# Altium PCB No.2 运放板.PcbDoc
Units mm, origin at the board's own origin, x right, y up, seen from the top; angles counter-clockwise.
Board outline 50 x 60 mm, 2 copper layers (Top Layer, Bottom Layer), stack 0.325 mm thick; 27 components, 23 nets, 87 pads, 10 vias.
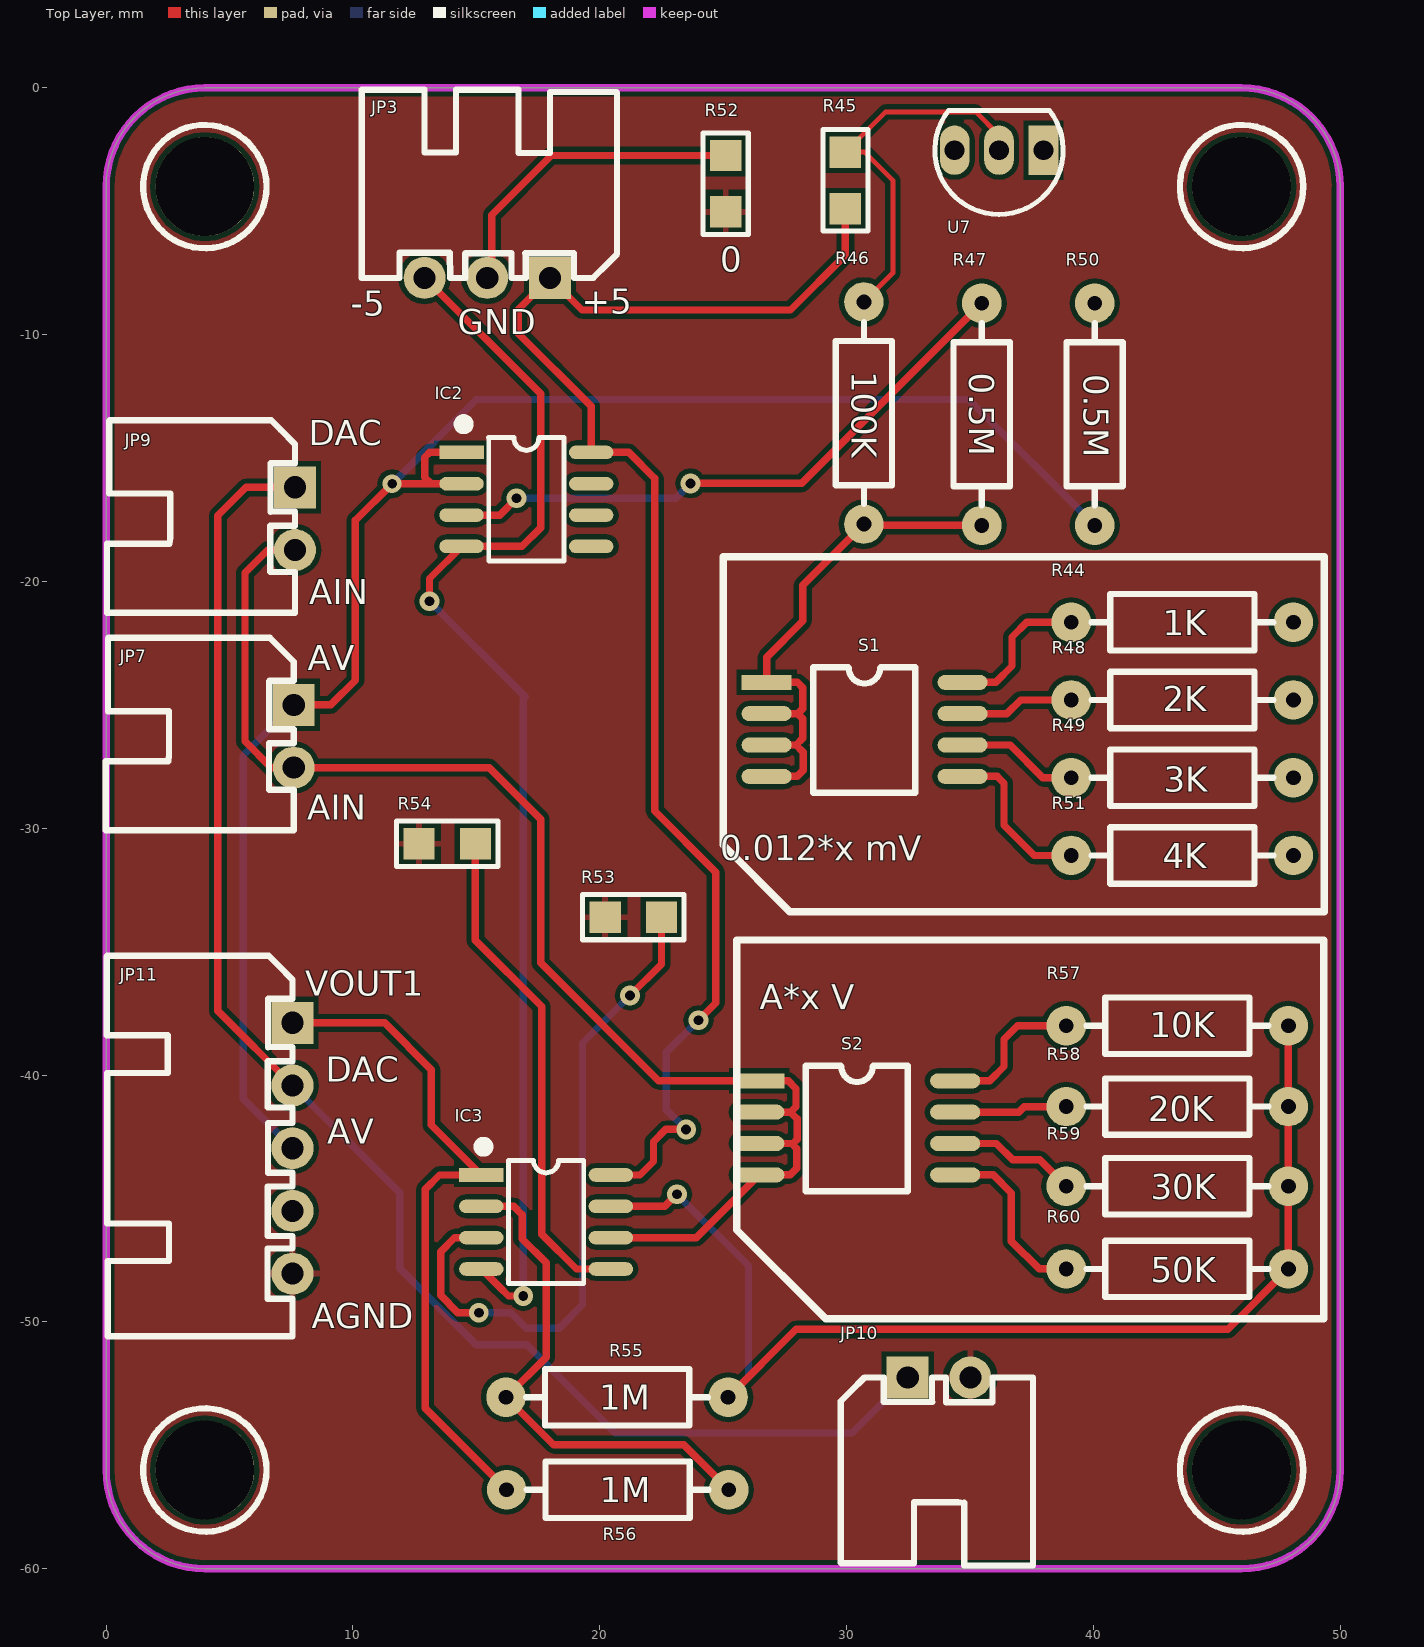
[diagram p0: Top Layer view]
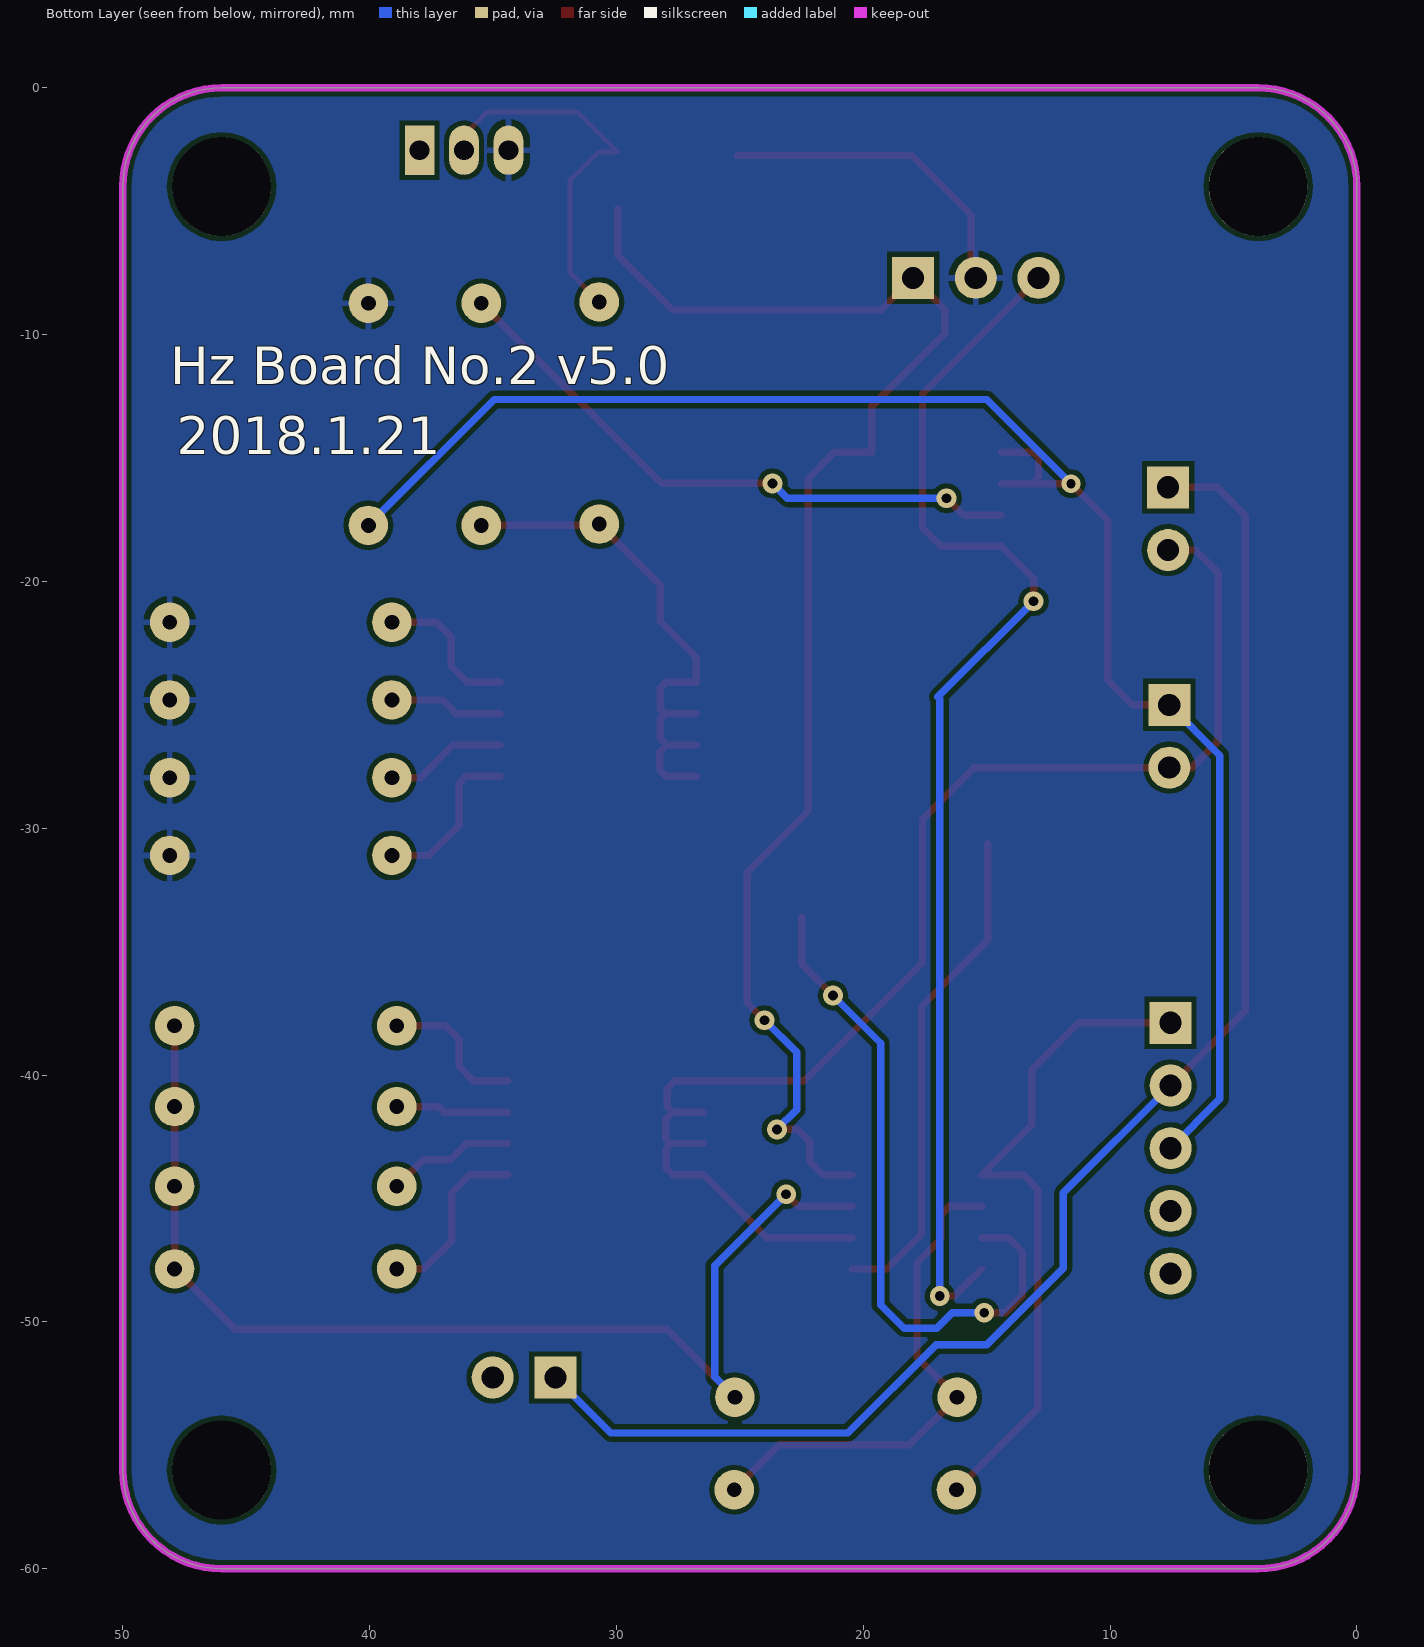
[diagram p1: Bottom Layer view, seen from below]
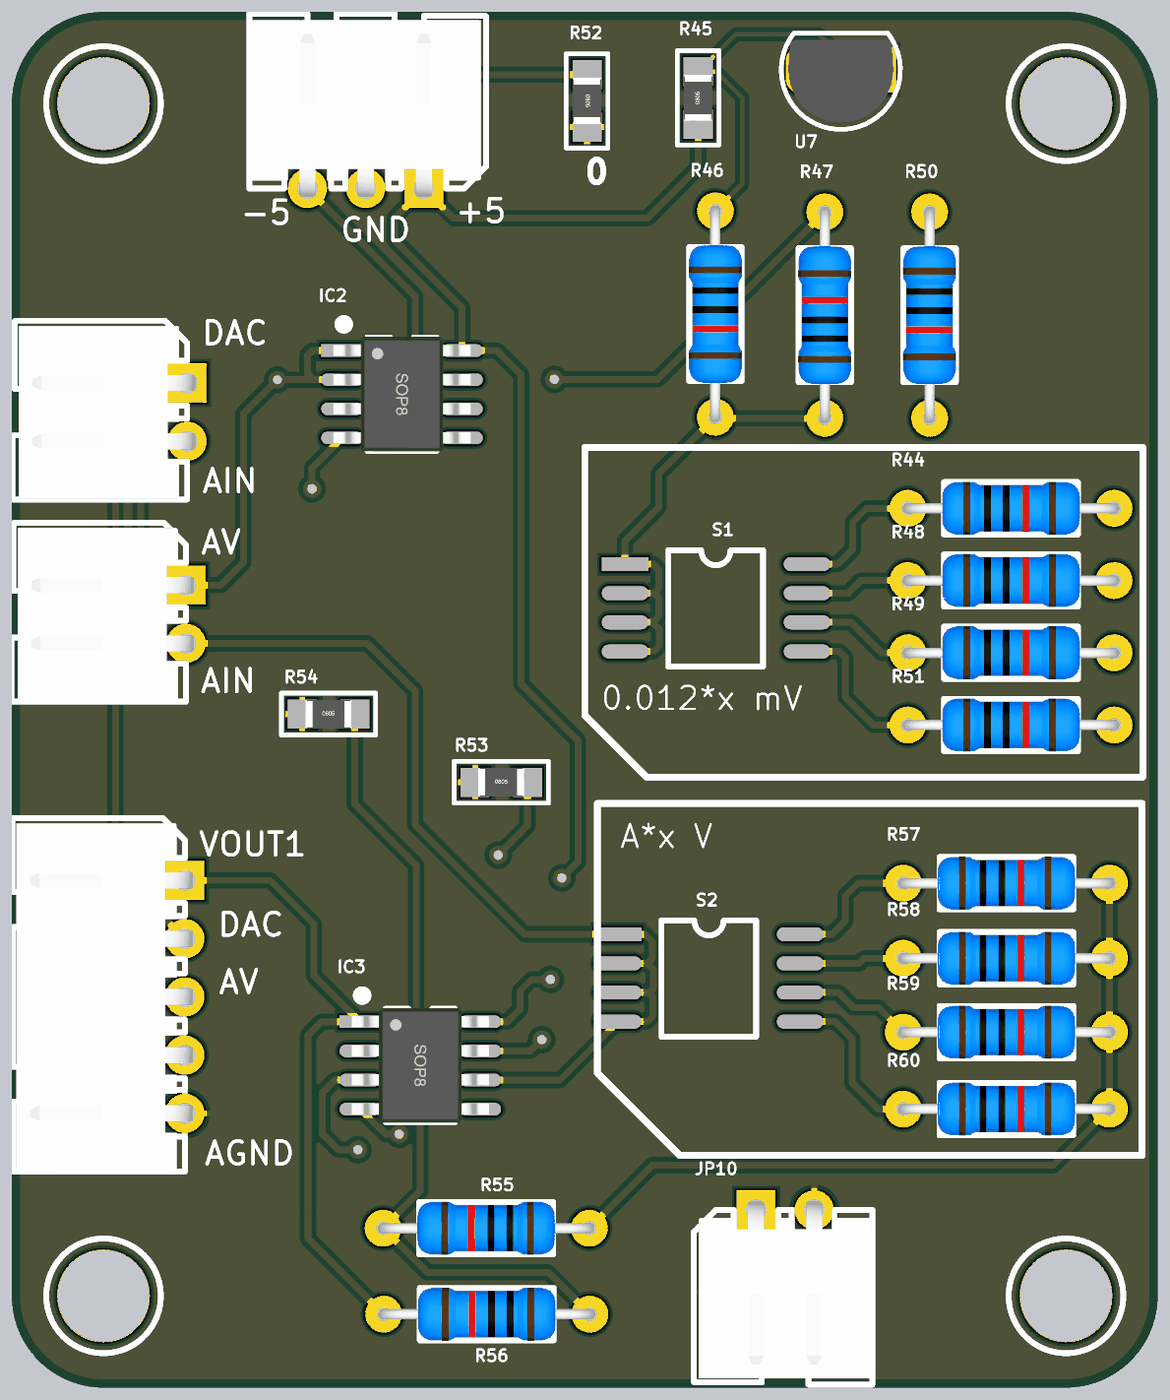
[diagram p2: 3D render of the assembled board from above, using the file's embedded part models]

## Layer stack, top to bottom
Top Solder: solder mask 0.0102, Solder Resist, Dk 3.5
Top Layer: signal copper 0.0356
Dielectric 1: core 0.254, FR-4, Dk 4.2
Bottom Layer: signal copper 0.0356
Bottom Solder: solder mask 0.0102, Solder Resist, Dk 3.5

## Board outline
4,-60 cw(c4,-56) 0,-56 0,-4 cw(c4,-4) 4,0 46,0 cw(c46,-4) 50,-4 50,-56 cw(c46,-56) 46,-60

## Design rules (kind name [scope] priority, off if disabled: settings)
Clearance [All] p1: gap=0.2
PolygonConnect [All] p1: connectstyle=Relief reliefconductorwidth=0.254 reliefentries=4 polygonreliefangle="90 Angle" airgapwidth=0.254
RoutingVias [All] p1: holewidth=0.4 width=0.8 viastyle="Through Hole" minholewidth=0.381 minwidth=0.762 maxholewidth=0.711 maxwidth=1.27
SolderMaskExpansion [All] p1: expansion=0.102
Width [All] p1: maxlimit=0.3 minlimit=0.2 preferedwidth=0.2
30 further rules are at their usual default settings.

## Components (designator, comment, footprint, x,y, rotation, side; value= is the part's Value field where it differs from the comment)
IC2 "LT1462" SOP8_N 17.025,-16.675 r0 top
IC3 "LT1462" SOP8_N 17.825,-45.95 r0 top
JP3 "HDR-1X3" XH2.54-WI-3P 15.44,-7.7 r180 top
JP7 "HDR-1X2" XH2.54-WI-2P 7.6,-26.27 r270 top
JP9 "HDR-1X2" XH2.54-WI-2P 7.65,-17.455 r270 top
JP10 "HDR-1X2" XH2.54-WI-2P 33.745,-52.25 r0 top
JP11 "HDR-1X5" XH2.54-WI-5P 7.55,-42.96 r270 top
R44 "1K_H" "RS 1/4W" 43.6,-21.65 r0 top
R45 "200K" "R 0805_M" 29.95,-3.75 r90 top
R46 "100K_H" "RS 1/4W" 30.7,-13.175 r270 top
R47 "0.5M_H" "RS 1/4W" 35.475,-13.225 r90 top
R48 "12K_H" "RS 1/4W" 43.6,-24.8 r0 top
R49 "3K_H" "RS 1/4W" 43.6,-27.95 r0 top
R50 "0.5M_H" "RS 1/4W" 40.05,-13.225 r270 top
R51 "4K_H" "RS 1/4W" 43.6,-31.1 r0 top
R52 "0" "R 0805_M" 25.1,-3.882 r270 top
R53 "0.5M" "R 0805_M" 21.357,-33.6 r0 top
R54 "0.5M" "R 0805_M" 13.818,-30.625 r0 top
R55 "1M_H" "RS 1/4W" 20.7,-53.05 r180 top
R56 "1M_H" "RS 1/4W" 20.725,-56.8 r180 top
R57 "10K_H" "RS 1/4W" 43.4,-38 r0 top
R58 "20K_H" "RS 1/4W" 43.4,-41.275 r0 top
R59 "30K_H" "RS 1/4W" 43.4,-44.5 r0 top
R60 "50K_H" "RS 1/4W" 43.4,-47.85 r0 top
S1 "SW DIP-4" SO-8M 26.76,-24.085 r0 top
S2 "SW DIP-4" SO-8M 26.46,-40.23 r0 top
U7 "LM285-1.2" TO92A 36.175,-2.525 r90 top

## Footprints (in the part's own frame and the unit in brackets; to place one, negate y for a bottom-side part, rotate by r counter-clockwise, add the part's x,y. Pads: shape width x height; smd on the part's side, far side on the other; paste and mask are expansions set on the pad)
"R 0805_M" [mil] "1/8W贴片电阻"
  rect 50x50 smd: 1(-45,0) 2(45,0)
  silkscreen extent -81,-36 81,36, body extent -39,-25 39,25, height 20
"RS 1/4W" [mm] "直插色环电阻，脚距9mm，直径2.3mm"
  round 1.6 hole 0.6: 1(-4.5,0) 2(4.5,0)
  silkscreen extent -3.68,-1.14 3.68,1.14, body extent -4.72,-1.16 4.73,1.16, height 2.32
SO-8M [mil]
  rect 80x24 smd: 1(0,0)
  oval 80x24 smd: 2(0,-50) 3(0,-100) 4(0,-150) 5(312.6,-150) 6(312.6,-100) 7(312.6,-50) 8(312.6,0)
  silkscreen extent 74,-176 237,24
SOP8_N [mm] "5*6*1.8mm（长宽高）"
  rect 1.8x0.55 smd: 1(-2.625,1.905)
  oval 1.8x0.55 smd: 2(-2.625,0.635) 3(-2.625,-0.635) 4(-2.625,-1.905) 5(2.625,-1.905) 6(2.625,-0.635) 7(2.625,0.635) 8(2.625,1.905)
  silkscreen extent -2.69,-2.5 1.52,3.2, body extent -3,-2.5 3,2.5, height 1.9
TO92A [mm] "92晶体管"
  rect 2x1.2 hole 0.8: 1(0,-1.8)
  oval 2x1.2 hole 0.8: 2(0,0) 3(0,1.8)
  silkscreen extent -2.6,-2.6 1.6,2.6, body extent -2.3,-2.3 1.3,2.3, height 7.6
XH2.54-WI-2P [mm] "接插件，2P"
  rect 1.7x1.7 hole 0.9: 1(-1.27,0)
  round 1.7 hole 0.9: 2(1.27,0)
  silkscreen extent -3.99,-7.62 3.81,0, body extent -3.77,-7.35 3.77,0.35, height 5.73
XH2.54-WI-3P [mm] "接插件，3P"
  rect 1.7x1.7 hole 0.9: 1(-2.54,0)
  round 1.7 hole 0.9: 2(0,0) 3(2.54,0)
  silkscreen extent -5.26,-7.62 5.08,0, body extent -5.04,-7.35 5.04,0.35, height 5.73
XH2.54-WI-5P [mm] "接插件，5P"
  rect 1.7x1.7 hole 0.9: 1(-5.08,0)
  round 1.7 hole 0.9: 2(-2.54,0) 3(0,0) 4(2.54,0) 5(5.08,0)
  silkscreen extent -7.8,-7.53 7.62,0, body extent -7.58,-7.35 7.58,0.35, height 5.73

## Part data
IC2 IC3: library part LT1678, "双运放"
JP3: library part "Header 3", "3P接插件"
JP7 JP9 JP10: library part "Header 2", "2P接插件"
JP11: library part "Header 5", "5P接插件"
R44 R45 R46 R47 R48 R49 R50 R51 R52 R53 R54 R55 R56 R57 R58 R59 R60: library part R, "贴片电阻"
S1 S2: "DIP Switch, 4 Position, SPST"

## Free pads (board coordinates)
  round 4 hole 4: 0(4,-56) 0(4,-4) 0(46,-56) 0(46,-4)

## Via types
v1: diameter 0.8, hole 0.4, Top Layer to Bottom Layer, tented both sides, 9 vias
v2: diameter 0.762, hole 0.381, Top Layer to Bottom Layer, tented both sides, 1 vias

## Nets (pads, with @x,y where several pads share a name; then routed paths per layer and width w, separated by ;. In a path a pad name is that pad's centre, name@x,y a point inside that pad or via, vN(x,y) a via of type N, cw(c..) or ccw(c..) an arc to the next point about the centre after c; other vN are vias at no path point)
AGND: JP10.2 JP11.5 R52.2 R53.1 R54.1
AIN: IC3.6 JP7.2 JP9.2 S2.1 S2.2 S2.3 S2.4 | length 55.7
  Top Layer w0.3: JP9.2 6.55,-18.725 5.625,-19.65 5.625,-26.475 6.69,-27.54 JP7.2 15.515,-27.54 17.6,-29.625 17.6,-35.45 22.38,-40.23 S2.1 27.63,-40.23 27.95,-40.55 27.95,-41.275 27.725,-41.5 ; IC3.6 23.915,-46.585 S2.4 27.71,-44.04 27.975,-43.775 27.975,-42.975 27.83,-42.83 27.83,-42.77 ; S2.3 27.83,-42.77 ; S2.2 27.725,-41.5 ; 27.725,-41.5 28,-41.775 28,-42.6 27.83,-42.77
DAC_VOUT: JP9.1 JP10.1 JP11.2 | length 61.4
  Top Layer w0.3: JP11.2 4.525,-37.395 4.525,-17.325 5.665,-16.185 JP9.1
  Bottom Layer w0.3: JP11.2 11.9,-44.77 11.9,-47.825 15,-50.925 17.05,-50.925 20.625,-54.5 30.225,-54.5 JP10.1
GND: JP3.2 R44.2 R48.2 R49.2 R50.1 R51.2 R52.1 U7.3 | length 13.1
  Top Layer w0.3: JP3.2 15.625,-7.515 15.625,-5.15 18.036,-2.739 R52.1
NET1: IC3.7 R55.1 R57.2 R58.2 R59.2 R60.2 | length 47.3
  Top Layer w0.3: IC3.7 22.635,-45.315 v1(23.125,-44.825) ; R55.1 27.95,-50.3 45.45,-50.3 R60.2 R59.2 R58.2 R57.2
  Bottom Layer w0.3: v1(23.125,-44.825) 26.025,-47.725 26.025,-52.225 R55.1
NET2: R46.2 R47.1 S1.1 S1.2 S1.3 S1.4 | length 22.2
  Top Layer w0.3: S1.4 28.005,-27.895 28.25,-27.65 28.25,-26.925 27.95,-26.625 ; S1.3 27.95,-26.625 ; S1.2 28.02,-25.355 ; R47.1 30.75,-17.725 R46.2 28.225,-20.15 28.225,-21.6 26.76,-23.065 S1.1 28.01,-24.085 28.225,-24.3 28.225,-25.15 28.02,-25.355 ; 27.95,-26.625 28.225,-26.35 28.225,-25.56 28.02,-25.355
NetIC2_3: IC2.3 R47.2 | length 24.6
  Top Layer w0.3: IC2.3 15.94,-17.31 v1(16.625,-16.625) ; v1(23.675,-16.025) 28.175,-16.025 R47.2
  Bottom Layer w0.3: v1(16.625,-16.625) 23.075,-16.625 v1(23.675,-16.025)
NetIC3_2: IC3.2 R55.2 R56.1 | length 20.8
  Top Layer w0.3: IC3.2 16.515,-45.315 16.85,-45.65 16.85,-46.625 17.825,-47.6 17.825,-51.425 R55.2 18.125,-54.975 23.4,-54.975 R56.1
NetIC3_3: IC3.3 R53.2 | length 27.4
  Top Layer w0.3: v1(15.1,-49.625) 14.25,-49.625 13.55,-48.925 13.55,-47.15 14.115,-46.585 IC3.3 ; v1(21.225,-36.775) 22.5,-35.5 R53.2
  Bottom Layer w0.3: v1(15.1,-49.625) 16.4,-49.625 17.025,-50.25 18.35,-50.25 19.3,-49.3 19.3,-38.7 v1(21.225,-36.775)
NetIC3_5: IC3.5 R54.2 | length 20.3
  Top Layer w0.3: R54.2 14.961,-34.536 17.643,-37.218 17.643,-46.443 19.055,-47.855 IC3.5
NetR44_1: R44.1 S1.8 | length 6.1
  Top Layer w0.3: S1.8 36.04,-24.085 36.7,-23.425 36.7,-22.25 37.3,-21.65 R44.1
NetR45_2: R45.2 R46.1 U7.2 | length 15.7
  Top Layer w0.2: R46.1 31.875,-7.5 31.875,-3.75 30.732,-2.607 R45.2 31.582,-0.975 35.225,-0.975 36.175,-1.925 U7.2
NetR48_1: R48.1 S1.7 | length 4.6
  Top Layer w0.3: S1.7 36.495,-25.355 37.05,-24.8 R48.1
NetR49_1: R49.1 S1.6 | length 4.9
  Top Layer w0.3: S1.6 36.625,-26.625 37.95,-27.95 R49.1
NetR51_1: R51.1 S1.5 | length 6.7
  Top Layer w0.3: S1.5 36.095,-27.895 36.375,-28.175 36.375,-29.875 37.6,-31.1 R51.1
NetR57_1: R57.1 S2.8 | length 6.1
  Top Layer w0.3: S2.8 35.795,-40.23 36.375,-39.65 36.375,-38.55 36.925,-38 R57.1
NetR58_1: R58.1 S2.7 | length 4.6
  Top Layer w0.3: S2.7 36.975,-41.5 37.2,-41.275 R58.1
NetR59_1: R59.1 S2.6 | length 5.2
  Top Layer w0.3: S2.6 36.07,-42.77 36.725,-43.425 37.825,-43.425 R59.1
NetR60_1: R60.1 S2.5 | length 7.2
  Top Layer w0.3: S2.5 35.94,-44.04 36.675,-44.775 36.675,-46.725 37.8,-47.85 R60.1
VCC+5: IC2.8 IC3.8 JP3.1 R45.1 | length 60
  Top Layer w0.3: IC3.8 21.63,-44.045 22.175,-43.5 22.175,-42.7 22.675,-42.2 v1(23.5,-42.2) ; v1(24,-37.775) 24.7,-37.075 24.7,-31.775 22.225,-29.3 22.225,-15.825 21.17,-14.77 IC2.8 19.65,-12.9 16.7,-9.95 16.7,-8.98 JP3.1 19.28,-9 27.725,-9 29.95,-6.775 R45.1
  Bottom Layer w0.3: v1(23.5,-42.2) 22.7,-41.4 22.7,-39.075 v1(24,-37.775)
VCC-5: IC2.4 IC3.4 JP3.3 | length 50.3
  Top Layer w0.3: JP3.3 17.6,-12.4 17.6,-17.825 16.845,-18.58 IC2.4 13.1,-19.88 v1(13.1,-20.8) ; IC3.4 15.945,-48.6 15.95,-48.6 16.3,-48.95 v1(16.9,-48.95)
  Bottom Layer w0.3: v1(13.1,-20.8) 16.975,-24.675 16.9,-24.75 v1(16.9,-48.95)
VOUT1: IC3.1 JP11.1 R56.2 | length 27.6
  Top Layer w0.3: JP11.1 11.28,-37.88 13.175,-39.775 13.175,-42.02 IC3.1 13.505,-44.045 12.925,-44.625 12.925,-53.5 R56.2
VOUT-10MV: IC2.1 IC2.2 JP7.1 JP11.3 R50.2 | length 68.7
  Top Layer w0.3: JP7.1 9.1,-25 10.1,-24 10.1,-17.525 v2(11.585,-16.04) 13.165,-16.04 ; IC2.2 13.165,-16.04 ; IC2.1 13.105,-14.77 12.9,-14.975 12.9,-15.775 13.165,-16.04
  Bottom Layer w0.3: JP11.3 5.55,-40.96 5.55,-27.05 JP7.1 ; v2(11.585,-16.04) 15,-12.625 34.95,-12.625 R50.2
pads on no net: IC2.5 IC2.6 IC2.7 JP11.4 U7.1

## Polygon pours and split planes (outlines as drawn)
AGND on Top Layer "Top Layer-AGND" (solid, pour order 16): 0,0 50,0 50,-60 0,-60 0,0
GND on Bottom Layer "Bottom-GND" (solid, pour order 18): 0,0 50,0 50,-60 0,-60 0,0

## Keep-outs
Keep-Out Layer:
  the board outline again, w0.3

## Other copper
Top Layer:
  pour cut-out: 2.7,0.6 2.7,0.3 -0.9,-3.3 -0.9,0.8 2.5,0.8
  pour cut-out: 47.55,1.05 48.15,0.45 48.15,-0.05 50.85,-2.75 51.15,-2.45 51.15,0.95 47.75,0.95 47.55,1.15
  pour cut-out: 50.975,-57.5 50.775,-57.7 50.075,-57.7 50.075,-57.9 47.475,-60.5 47.575,-60.6 51.375,-60.6 51.375,-57.9
  pour cut-out: 2.418,-60.018 -0.3,-57.3 -0.6,-57.3 -0.6,-60.3 -0.1,-60.8
Bottom Layer:
  pour cut-out: 2.8,0.5 -1,-3.3 -1,0.7 -0.8,0.9
  pour cut-out: -0.3,-57.1 2.7,-60.1 2.7,-60.3 -0.1,-60.3 -0.6,-60.8
  pour cut-out: 47.375,-60.4 49.045,-59.165 50.275,-57.5 51.375,-57.5 51.375,-60.5 51.675,-60.8
  pour cut-out: 50.825,-2.85 47.225,0.75 50.925,0.75 51.025,0.85

## Silkscreen, mask and mechanical layers (free items; w line width, h text height)
Top Overlay:
  circle w0.254: c4,-4 r2.5
  circle w0.254: c4,-56 r2.5
  circle w0.254: c46,-56 r2.5
  circle w0.254: c46,-4 r2.5
  lines w0.3: 25,-30.675 25,-19 49.35,-19 49.35,-33.375 27.7,-33.375 25,-30.675 ; 25.55,-46.275 25.55,-34.525 49.325,-34.525 49.325,-49.875 29.15,-49.875 25.55,-46.275
  text "0" at 24.875,-7.45 h1
  text "+5" at 19.275,-9.15 h1
  text "-5" at 9.9,-9.225 h1
  text "GND" at 14.25,-9.975 h1
  text "100K" at 30.2,-11.475 h1 r270
  text "0.5M" at 34.975,-11.55 h1 r270
  text "0.5M" at 39.6,-11.6 h1 r270
  text "DAC" at 8.2,-14.475 h1
  text "AIN" at 8.225,-20.925 h1
  text "1K" at 42.8,-22.175 h1
  text "AV" at 8.175,-23.6 h1
  text "2K" at 42.8,-25.25 h1
  text "3K" at 42.85,-28.525 h1
  text "AIN" at 8.15,-29.65 h1
  text "0.012*x mV" at 24.875,-31.3 h1 r359.88
  text "4K" at 42.8,-31.625 h1
  text "VOUT1" at 8.075,-36.775 h1
  text "A*x V" at 26.475,-37.325 h1 r359.88
  text "10K" at 42.275,-38.475 h1
  text "DAC" at 8.9,-40.275 h1
  text "20K" at 42.225,-41.875 h1
  text "AV" at 8.95,-42.775 h1
  text "30K" at 42.325,-45.025 h1
  text "50K" at 42.325,-48.4 h1
  text "AGND" at 8.325,-50.25 h1
  text "1M" at 19.975,-53.55 h1
  text "1M" at 20,-57.3 h1
Bottom Overlay:
  text "Hz Board No.2 v5.0" at 48.075,-12 h1.52
  text "2018.1.21" at 47.825,-14.85 h1.52
Drill Drawing:
  text ".LEGEND" at 103.78,-53.62 h1.52
  text "Drill Drawing." at 103.78,-56.16 h1.52